# Altium PCB PCB1.PcbDoc
Units mil, origin at the board's own origin, x right, y up, seen from the top; angles counter-clockwise.
Board outline 2095 x 895 mil, 2 copper layers (Top Layer, Bottom Layer); 30 components, 51 nets, 163 pads, 44 vias.
Unrouted connection lines stored in the file: 40.
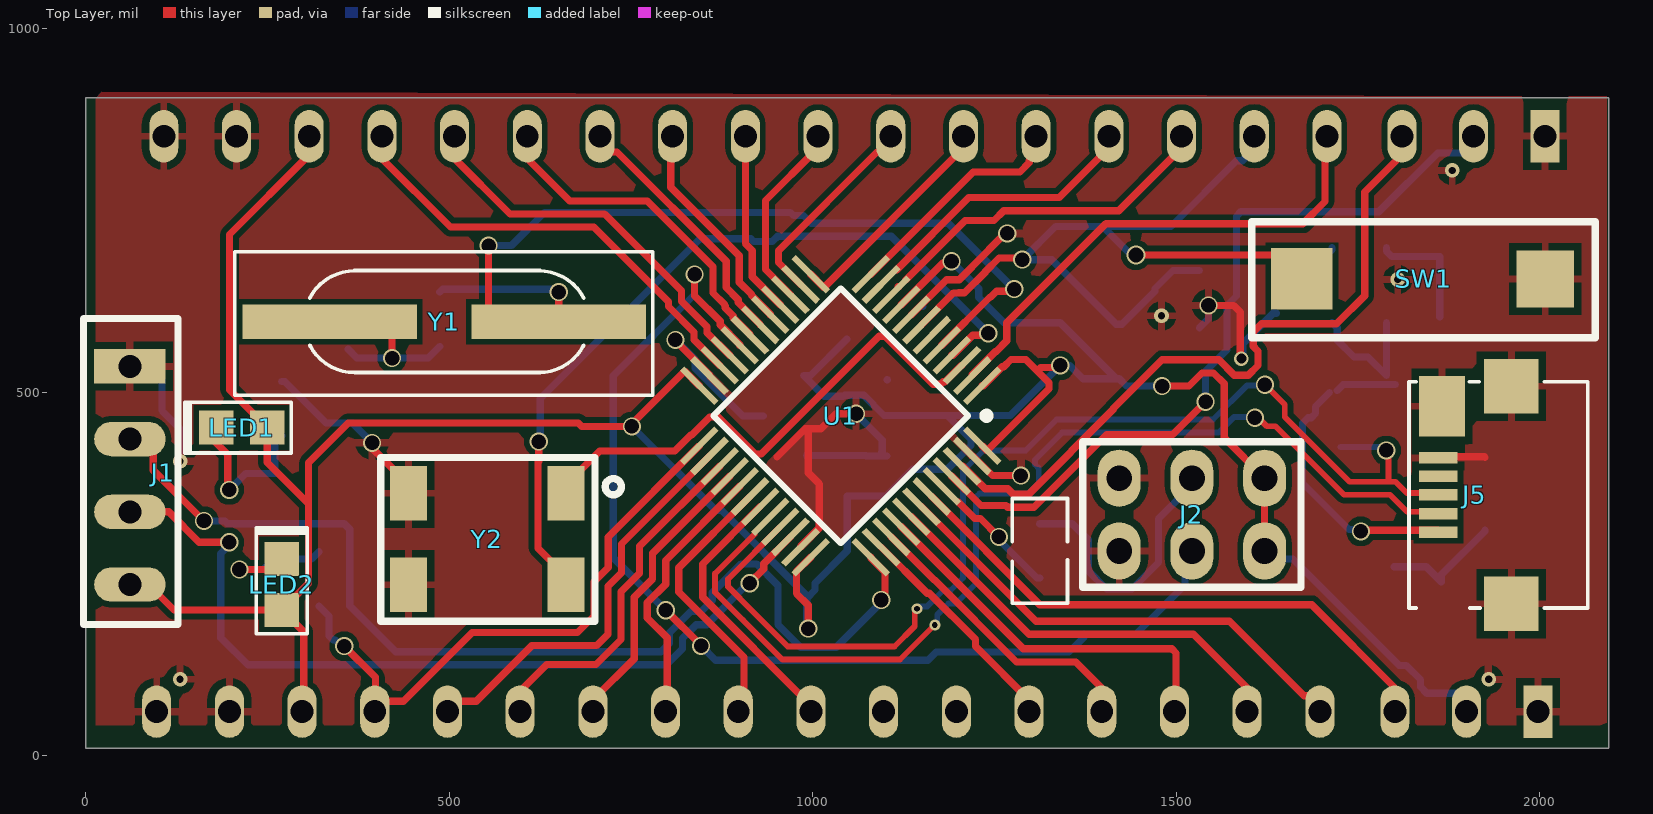
[diagram p0: Top Layer view]
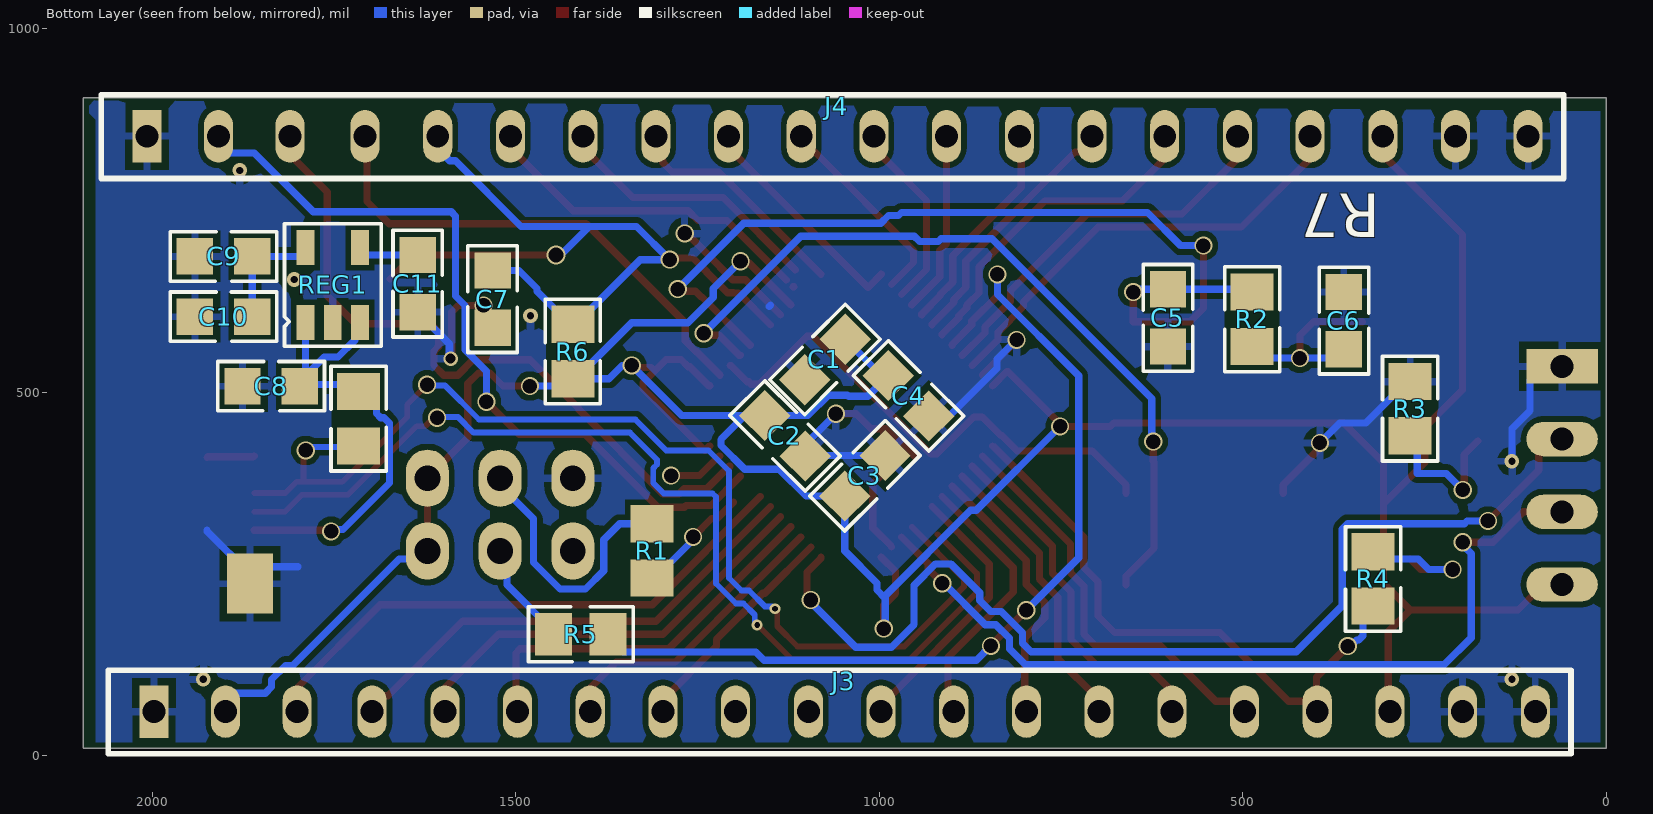
[diagram p1: Bottom Layer view, seen from below]
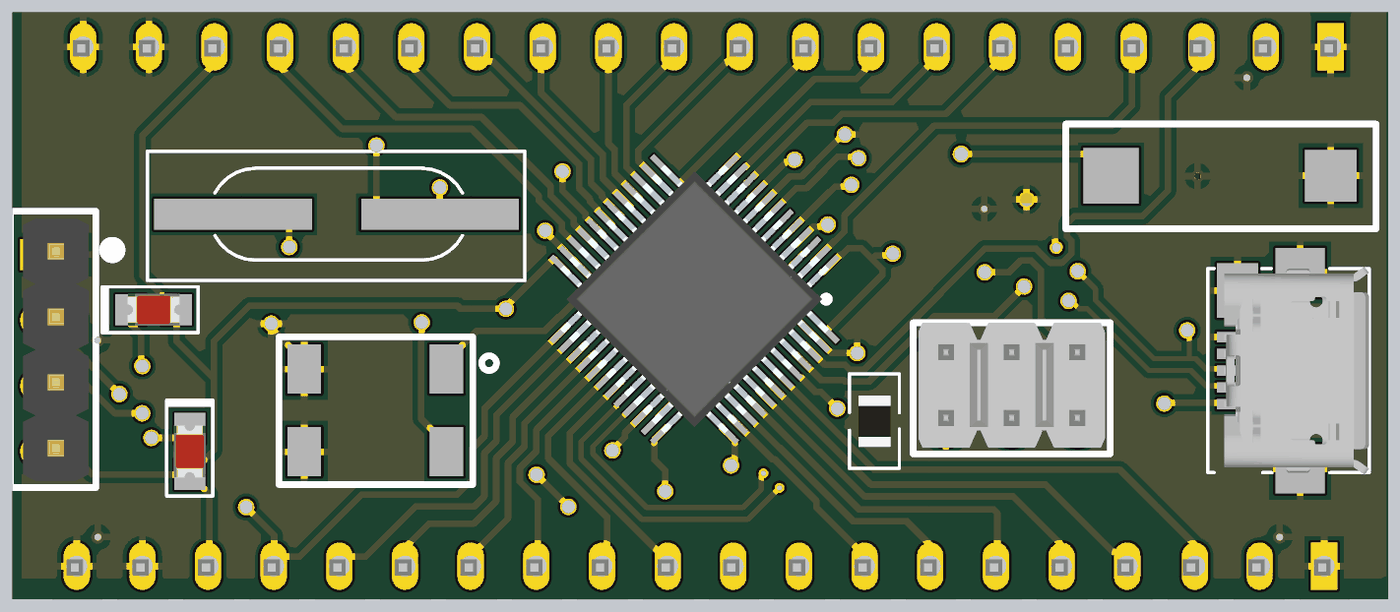
[diagram p2: 3D render of the assembled board from above, using the file's embedded part models]
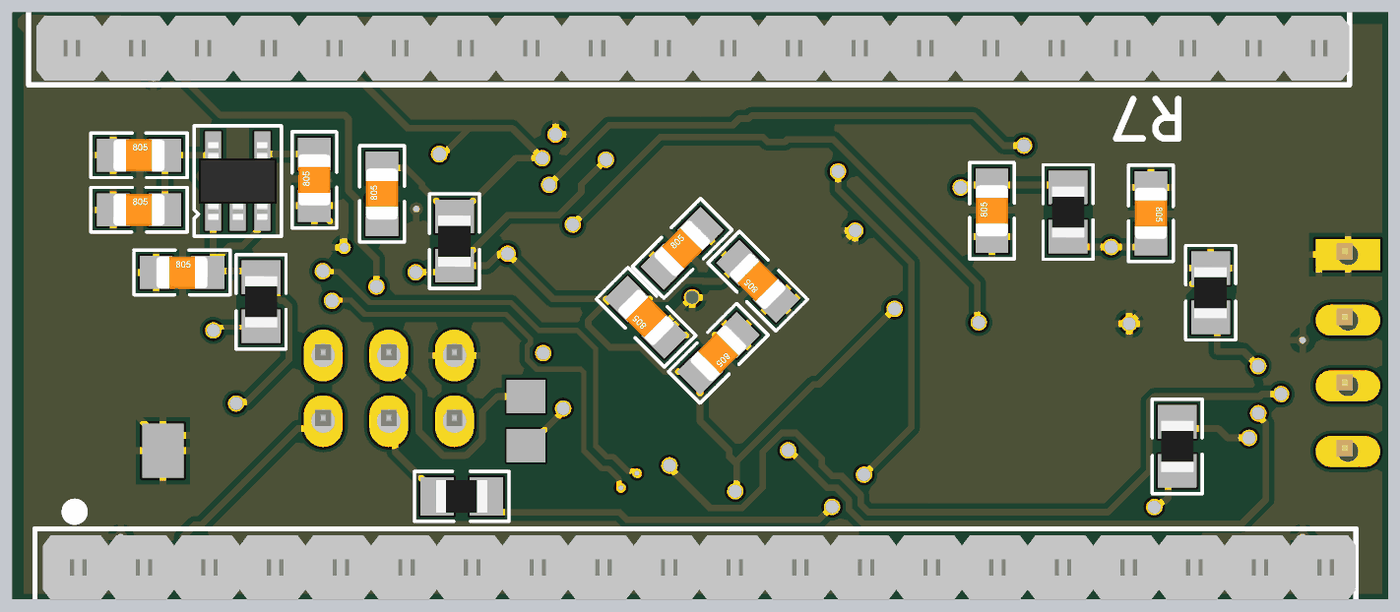
[diagram p3: 3D render of the assembled board from below, using the file's embedded part models]

## Layer stack, top to bottom
Top Solder: solder mask 0.4, Solder Resist, Dk 3.5
Top Layer: signal copper 1.4
Dielectric 1: dielectric 12.6, FR-4, Dk 4.8
Bottom Layer: signal copper 1.4
Bottom Solder: solder mask 0.4, Solder Resist, Dk 3.5

## Board outline
0,10 2095,10 2095,905 0,905

## Design rules (kind name [scope] priority, off if disabled: settings)
Clearance [All] p1: gap=8 ignorepadtopadclearanceinfootprint=TRUE
DiffPairsRouting DiffPair_90DiffPairsRouting [InDifferentialPairClass('diff_90')] p1: maxlimit=10 minlimit=10 mostfreqgap=10 toplayer_minwidth=8 toplayer_maxwidth=8 toplayer_prefwidth=8 bottomlayer_minwidth=8 bottomlayer_maxwidth=8 bottomlayer_prefwidth=8 maxuncoupledlength=500
DiffPairsRouting [All] p2: maxlimit=10 minlimit=10 mostfreqgap=10 toplayer_minwidth=15 toplayer_maxwidth=15 toplayer_prefwidth=15 bottomlayer_minwidth=15 bottomlayer_maxwidth=15 bottomlayer_prefwidth=15 maxuncoupledlength=500
MatchedLengths DiffPair_90MatchedLengths [InDifferentialPairClass('diff_90')] p1: tolerance=1000 checknetsindiffpair=FALSE checkdiffpairvsdiffpair=TRUE checkxsignals=TRUE checkothers=TRUE
MinimumSolderMaskSliver [All] p1: minsoldermaskwidth=1.57
PolygonConnect [All] p1: connectstyle=Relief reliefconductorwidth=10 reliefentries=4 polygonreliefangle="90 Angle" airgapwidth=10
RoutingVias [All] p1: holewidth=20 width=25 viastyle="Through Hole" minholewidth=11.81 minwidth=20 maxholewidth=20 maxwidth=28
SilkToSolderMaskClearance [IsPad] p1: minsilkscreentomaskgap=1.73 clearancetoexposedcopper=TRUE
SolderMaskExpansion [All] p1: expansion=4 istentingtop=FALSE
SupplyNets "Schematic Supply Nets_2" [InNet('+5')] p1: voltage=0.000
SupplyNets "Schematic Supply Nets_1" [InNet('NetLabel44')] p2: voltage=0.000
SupplyNets "Schematic Supply Nets" [InNet('GND')] p3: voltage=0.000
Width Width_1 [All] p1: maxlimit=10 minlimit=10 preferedwidth=10
Width [All] p2: maxlimit=10 minlimit=10 preferedwidth=10
27 further rules are at their usual default settings.

## Classes and differential pairs
differential pair class diff_90: D
component class Controller: C1 C2 C3 C4 C5 C6 C7 J1 J2 LED1 LED2 R1 R2 R3 R4 R5 R6 SW1 U1 Y1 Y2
component class Connector: C8 C9 C10 C11 J3 J5 l REG1
differential pair D: +D_P -D_N

## Components (designator, comment, footprint, x,y, rotation, side; value= is the part's Value field where it differs from the comment)
C1 "0.1uF" CAP_0805 1075,545 r135 bottom
C2 "0.1uF" CAP_0805 1130,440 r45 bottom
C3 "0.1uF" CAP_0805 1020,385 r315 bottom
C4 "0.1uF" CAP_0805 960,495 r45 bottom
C5 "22pF" CAP_0805 603.16,602.29 r90 bottom
C6 "22pF" CAP_0805 361.17,598.36 r270 bottom
C7 "0.1uF" CAP_0805 1532.14,627.95 r90 bottom
C8 "0.1uF" CAP_0805 1836.79,508.23 r180 bottom
C9 "0.1uF" CAP_0805 1902.28,686.76 r180 bottom
C10 "0.1uF" CAP_0805 1902.28,603.81 r180 bottom
C11 "22pF" CAP_0805 1635.22,649.37 r90 bottom
J1 "4X1 Bergstrip" CON4_100_40D72_TH_ST_MALE 61.02,535.46 r0 top
J2 "2X3 Berg Strip" CON6_100_59D78_TH_ST_Duplicate 1621.83,381.67 r180 top
J3 "20X1 Bergstrip" CON20_100_40D72_TH_ST 1997.82,60.61 r90 bottom
J4 "20X1 Bergstrip" CON20_100_40D72_TH_ST 2007.61,852 r90 bottom
J5 "MICRO USB2.0" CON_10118192-0001LF_SMD 1911.1,358.62 r90 top
LED1 "RED LED" LED_0805 214.97,451.4 r0 top
LED2 "RED LED" LED_0805 270,235.46 r270 top
R1 "10K" RES_0805#1 1312.71,281.67 r90 top
R2 "10Mohm" RES_0805#2 487.24,600.33 r90 bottom
R3 "1K" RES_0805#2 270,477.38 r270 bottom
R4 "1K" RES_0805#2 320.97,243.11 r90 bottom
R5 "10K" RES_0805#2 1410.82,167.01 r180 bottom
R6 "10K" RES_0805#2 1421.83,555.96 r270 bottom
R7 "10K" RES_0805#2 1716.47,463.56 r90 bottom
REG1 "RT9193-33GB" SOT23-5 1751.88,647.55 r180 bottom
SW1 "TACT SWITCH" SW_342_SMD 2007.86,655.74 r0 top
U1 "STM32F103C8T6" LQFP-48_19.6_393_58X11_SMD 1038.87,467.55 r225 top
Y1 "8MHz" XTAL_314_240X47_SMD 650.96,597 r180 top
Y2 "32.768KHz" "XTAL_MC-405 32.7680K-G3" 660.89,235.02 r180 top

## Footprints (in the part's own frame and the unit in brackets; to place one, negate y for a bottom-side part, rotate by r counter-clockwise, add the part's x,y. Pads: shape width x height; smd on the part's side, far side on the other; paste and mask are expansions set on the pad)
CAP_0805 [mil] "Ceramic Capacitor"
  rect 50x50 smd mask+3: 1(-39.37,0) 2(39.37,0)
  silkscreen extent -73,-34 73,34, body extent -39,-25 39,25, height 31
CON4_100_40D72_TH_ST_MALE [mm] "Berg Strip"
  rect 2.5x1.2 hole 0.8: 1(0,0)
  oval 2.5x1.2 hole 0.8: 2(0,-2.54) 3(0,-5.08) 4(0,-7.62)
  round 1.016 on Top Overlay: ""(2.311,0.178)
  silkscreen extent -1.63,-9.02 1.68,1.68, body extent -1.14,-8.76 1.4,1.4, height 8.55
CON6_100_59D78_TH_ST_Duplicate [mm] "Berg strip"
  oval 1.5x2 hole 0.9: 1(0,0) 2(0,2.54) 3(2.54,0) 4(2.54,2.54) 5(5.08,0) 6(5.08,2.54)
  silkscreen extent -1.27,-1.27 6.35,3.81, body extent -1.07,-1.27 6.15,3.56, height 8.18
CON20_100_40D72_TH_ST [mil] "Berg strip"
  rect 72x40 hole 31.5: 1(0,0)
  oval 72x40 hole 31.5: 2(0,-98.43) 3(0,-196.85) 4(0,-300) 5(0,-400) 6(0,-500) 7(0,-600) 8(0,-700) 9(0,-800) 10(0,-900) 11(0,-1000) 12(0,-1100) 13(0,-1200) 14(0,-1300) 15(0,-1400) 16(0,-1500) 17(0,-1600) 18(0,-1700) 19(0,-1800) 20(0,-1900)
  round 40 on Bottom Overlay: ""(83,2.57)
  silkscreen extent -58,-1949 57,63, body extent -51,-1949 47,51, height 323
CON_10118192-0001LF_SMD [mm] "USB2.0 MICRO"
  rect 0.4x1.35 smd: 1(-1.3,1.275) 2(-0.65,1.275) 3(0,1.275) 4(0.65,1.275) 5(1.3,1.275)
  rect 2.1x1.6 smd far side: 6(-3.1,1.15)
  rect 2.1x1.6 smd: 7(3.1,1.15)
  rect 1.9x1.9 smd: 8(-3.8,-1.275) 9(3.8,-1.275)
  silkscreen extent -3.95,-3.94 3.95,2.3, body extent -4.04,-3.94 4.04,1.66, height 2.81
LED_0805 [mm] "LED"
  rect 1.2x1.2 smd mask+0.076: A(0.889,0) K(-0.889,0)
  silkscreen extent -1.99,-0.89 1.73,0.89, body extent -1.01,-0.62 1.01,0.63, height 1.1
LQFP-48_19.6_393_58X11_SMD [mm] "48LQFP"
  rect 1.7x0.22 smd mask+0.076: 1(-4.238,2.75) 2(-4.238,2.25) 3(-4.238,1.75) 4(-4.238,1.25) 5(-4.238,0.75) 6(-4.238,0.25) 7(-4.238,-0.25) 8(-4.238,-0.75) 9(-4.238,-1.25) 10(-4.238,-1.75) 11(-4.238,-2.25) 12(-4.238,-2.75) 25(4.238,-2.75) 26(4.238,-2.25) 27(4.238,-1.75) 28(4.238,-1.25) 29(4.238,-0.75) 30(4.238,-0.25) 31(4.238,0.25) 32(4.238,0.75) 33(4.238,1.25) 34(4.238,1.75) 35(4.238,2.25) 36(4.238,2.75)
  rect 0.22x1.7 smd mask+0.076: 13(-2.75,-4.238) 14(-2.25,-4.238) 15(-1.75,-4.238) 16(-1.25,-4.238) 17(-0.75,-4.238) 18(-0.25,-4.238) 19(0.25,-4.238) 20(0.75,-4.238) 21(1.25,-4.238) 22(1.75,-4.238) 23(2.25,-4.238) 24(2.75,-4.238) 37(2.75,4.238) 38(2.25,4.238) 39(1.75,4.238) 40(1.25,4.238) 41(0.75,4.238) 42(0.25,4.238) 43(-0.25,4.238) 44(-0.75,4.238) 45(-1.25,4.238) 46(-1.75,4.238) 47(-2.25,4.238) 48(-2.75,4.238)
  silkscreen extent -3.72,-3.15 3.15,3.72, body extent -4.5,-4.5 4.5,4.5, height 1.7
RES_0805#1 [mm] "Resister"
  rect 1.3x1.5 smd far side mask+0.076: 1(0.95,0) 2(-0.95,0)
  silkscreen extent -1.83,-0.97 1.83,0.97, body extent -1,-0.63 1,0.62, height 0.5
RES_0805#2 [mm] "Resister"
  rect 1.3x1.5 smd mask+0.076: 1(0.95,0) 2(-0.95,0)
  silkscreen extent -1.83,-0.97 1.83,0.97, body extent -1,-0.63 1,0.62, height 0.5
SOT23-5 [mm] "CASE: SOT"
  rect 0.62x1.22 smd mask+0.076: 1(-0.953,-1.31) 2(-0.003,-1.31) 3(0.947,-1.31) 4(0.952,1.31) 5(-0.953,1.31)
  silkscreen extent -1.69,-2.14 1.69,2.14, body extent -1.5,-1.5 1.5,1.5, height 1.41
SW_342_SMD [mm] "CASE: SMD"
  rect 2x2 smd: 1(0,0)
  rect 2.15x2.15 smd: 2(-8.5,0)
  silkscreen extent -10.25,-2.06 1.75,2, body extent -7.17,-1.79 -1.17,1.71, height 2.4
XTAL_314_240X47_SMD [mm] "CASE: TH"
  rect 6.096x1.2 smd: 1(0,0) 2(8,0)
  silkscreen extent -3.29,-2.44 11.32,2.57, body extent -2.99,-2.27 10.9,2.41, height 3.05
"XTAL_MC-405 32.7680K-G3" [mm] "Crystal"
  rect 1.3x1.9 smd: 1(0,-3.2) 2(5.5,-3.2) 3(5.5,0) 4(0,0)
  silkscreen extent -1.93,-4.44 6.48,1.27, body extent -1.02,-4.44 6.48,1.27, height 3.6

## Part data
C1 C2 C3 C4 C7 C8 C9 C10: library part CAP_0.1uF-50V-5%-0805, "0.1µF ±5% 50V Ceramic Capacitor X7R 0805 (2012 Metric)", Case/Package="0805 (2012 Metric)", Manufacturer=KEMET, Manufacturing Part Number=C0805C104J5RACTU, Supplier Part Number-1=399-1171-1-ND, Supplier-1=Digikey
C5 C6 C11: library part CAP_22pF-50V-5%-0805, "22pF ±5% 50V Ceramic Capacitor C0G, NP0 0805 (2012 Metric)", Case/Package=0805, Manufacturer=KEMET, Manufacturer Part Number=C0805C220J5GACTU, Supplier Part Number-1=399-1113-1-ND, Supplier-1=Digikey
J1: library part CON-BS-PLG_4X1-100-TH-ST, "4 pin, 1 row, 2.54mm pitch bergstrip", Case/Package=TH, Manufacturer=NA, Manufacturing Part Number=NA, Supplier Part Number-1=NA, Supplier-1=NA
J2: library part CON-BS-PLG_2X3-100-TH-ST, "6 pin, 2 row, 2.54mm pitch bergstrip", Case/Package=TH, Manufacturer=NA, Manufacturer Part Number=NA, Supplier Part Number-1=NA, Supplier-1=NA
J3 J4: library part CON-BS-PLG_20X1-100-TH-ST, "20 pin, 1 row, 2.54mm pitch bergstrip", Case/Package=TH, Manufacturer=NA, Manufacturing Part Number=NA, Supplier Part Number-1=NA, Supplier-1=NA
J5: library part CON-USB_10118192-0002LF-SMD, "USB - micro B USB 2.0 Receptacle Connector 5 Position Surface Mount, Right Angle", Case/Package=SMD, Manufacturer="Amphenol ICC (FCI)", Manufacturing Part Number=10118192-0002LF, Supplier Part Number-1=609-5379-1-ND, Supplier-1=Digikey
LED1 LED2: library part LED-RED_10mA-0805, "Red 621nm LED Indication - Discrete 2V 0805 (2012 Metric)", Case/ Package=0805, Manufacturer="Lite-On Inc.", Manufacturer Part Number=LTST-C170EKT, Supplier Part Number-1=160-1178-1-ND, Supplier-1=Digikey
R1 R5 R6 R7: library part RES_10K-0.125W-1%-0805, "10 kOhms ±1% 0.125W, 1/8W Chip Resistor 0805 (2012 Metric) Moisture Resistant Thick Film", Case/Package=0805, Manufacturer=Yageo, Manufacturing Part Number=RC0805FR-0710KL, Supplier Part Number-1=311-10.0KCRCT-ND, Supplier-1=Digikey
R2: library part RES_10MOHM-0.125W-1%-0805, "10 MOhms ±1% 0.125W, 1/8W Chip Resistor 0805 (2012 Metric) Automotive AEC-Q200, High Voltage Thick Film", Case/Package="0805 (2012 Metric)", Manufacturer="Rohm Semiconductor", Manufacturing Part Number=KTR10EZPF1005, Supplier Part Number-1=RHM10.0MAHCT-ND, Supplier-1=Digikey
R3 R4: library part RES_1K-0.125W-1%-0805, "1 kOhms ±1% 0.125W, 1/8W Chip Resistor 0805 (2012 Metric) Moisture Resistant Thick Film", Case/Package=0805, Manufacturer=垈㎵á, Manufacturer Part Number=RC0805FR-071KL, Supplier Part Number-1=311-1.00KCRCT-ND, Supplier-1=Digikey
REG1: library part REG_3.3V-5.5V-0.3A-SOT-23-5, "Linear Voltage Regulator IC 1 Output 300mA SOT-23-5", Case/ Package=SOT-23-5, Manufacturer="Richtek USA Inc.", Supplier Part Number-1=1028-1014-1-ND, Manufacturer Part Number=RT9193-33GB, Supplier-1=Digikey
SW1: library part SW_KSR223GLFG-SMD, "Tactile Switch SPST-NO Top Actuated Surface Mount", Case/Package=SMD, Manufacturer=C&K, Manufacturing Part Number=KSR223GLFG, Supplier Part Number-1=401-1704-1-ND, Supplier-1=Digikey
U1: library part "IC-STM32F103C8T6 _1", "ARM® Cortex®-M3 STM32F1 Microcontroller IC 32-Bit 72MHz 64KB (64K x 8) FLASH", Case/Package=48-LQFP, Manufacturer=STMicroelectronics, Supplier Part Number-1=497-6063-ND, Manufacturer Part Number=STM32F103C8T6, Supplier-1=Digikey
Y1: library part XTAL_8MHZ-LFXTAL030234, "Crystals 8MHz 22pF -20C 70C", Case/Package=SMD, Manufacturer="IQD Frequency Products", Manufacturing Part Number=LFXTAL030234Reel, Supplier Part Number-1=449-LFXTAL030234REEL, Supplier-1=Mouser
Y2: library part "XTAL_32.768KHz-MC-405 32.7680K-G3", "Crystals SMD AT XTL MHZ +/-50PPM 12.5 PF 250 T/R", Case/Package=SMD, Manufacturer=Epson, Manufacturing Part Number="MC-405 32.7680K-G3: ROHS", Supplier Part Number-1=732-MC405327680KG3RS, Supplier-1=Mouser

## Via types
v1: diameter 25, hole 20, Top Layer to Bottom Layer, 34 vias
v2: diameter 20, hole 10, Top Layer to Bottom Layer, tented both sides, 6 vias
v3: diameter 15, hole 8, Top Layer to Bottom Layer, 2 vias
v4: diameter 20, hole 13.78, Top Layer to Bottom Layer, 1 vias
v5: diameter 25.75, hole 20.81, Top Layer to Bottom Layer, 1 vias

## Nets (pads, with @x,y where several pads share a name; then routed paths per layer and width w, separated by ;. In a path a pad name is that pad's centre, name@x,y a point inside that pad or via, vN(x,y) a via of type N, cw(c..) or ccw(c..) an arc to the next point about the centre after c; other vN are vias at no path point)
+5: C8.2 J5.1 R7.1 REG1.1 REG1.3 | length 622.6
  Top Layer w10: v1@1759.65,309.92 J5.1@1860.08,309.92
  Bottom Layer w10: R7.1@1711.16,499.59 1691.95,480.38 1691.95,470.61 1686.09,464.76 1681.56,464.76 1673.95,457.14 1673.95,374.97 1737.91,311 1751.87,311 v1(1754.34,308.53) ; REG1.3 1721.79,588.77 1721.79,571.57 1744.83,548.52 1763.87,548.52 1789.39,523 REG1.1 ; R7.1@1721.79,502.35 1729.91,510.47 C8.2@1801.92,510.47
BOOT0: J2.3 R1.1 | length 375.5
  Bottom Layer w10: R1.1 1357.24,319.07 1379.3,297.01 1379.3,254.21 1404.22,229.3 1439.45,229.3 1475.95,265.8 1475.95,325.94 1521.83,371.83 J2.3
BOOT1: J2.4 R5.2 | length 145.1
  Bottom Layer w10: R5.2 1448.22,170.95 1512.45,235.18 1512.45,272.28 J2.4
D_N: J5.2 U1.32 | length 1429.2
  Top Layer w8: U1.32@920.09,304.64 865.87,250.42 865.87,224.8 904.24,186.44 958.46,132.21 1120.25,132.21 1167.9,179.86 v3(1168.21,179.86) ; v1(1608.46,464.95) 1613.06,464.95 1624.96,453.04 1636.86,453.04 1731.02,358.89 1794.46,358.89 1817.85,335.51 J5.2@1860.08,335.51
  Bottom Layer w8: v3(1168.21,179.86) 1171.46,183.11 1171.46,193.72 1186.95,209.21 1197.25,209.21 1224.93,236.89 1224.93,356.11 1229.61,360.79 1251.09,360.79 1296.8,360.79 1311.16,375.14 1311.16,395.44 1306.05,400.54 1306.05,407.17 1343.22,444.34 1558.25,444.34 1579.96,466.04 1607.36,466.04 v1(1608.46,464.95)
D_P: J5.3 R7.2 U1.33 | length 1549.1
  Top Layer w8: U1.33 883.87,242.96 883.87,232.26 916.96,199.17 965.92,150.21 1112.8,150.21 1140.54,177.95 1140.54,198.86 v3(1143.79,202.11) ; v1(1622.34,510.2) 1649.59,482.95 1649.59,465.77 1738.47,376.89 1792.42,376.89 ; v1@1792.42,419.23 1792.42,376.89 ; J5.3@1860.08,361.1 1859.88,361.3 1817.51,361.3 1801.92,376.89 1792.42,376.89
  Bottom Layer w8: v3(1143.79,202.11) 1147.04,205.36 1157.65,205.36 1179.5,227.21 1189.8,227.21 1206.93,244.34 1206.93,391.66 1235.16,419.9 1293.32,419.9 1335.76,462.34 1550.8,462.34 1597.84,509.38 1621.53,509.38 v1(1622.34,510.2) ; R7.2@1726.32,424.78 1779.65,424.78 1784.54,419.89 v1(1789.15,419.89)
GND: C1.1 C2.1 C3.1 C4.1 C5.1 C6.1 C7.1 C8.1 C9.1 C10.1 C11.1 J1.1 J2.5 J2.6 J3.1 J3.19 J3.20 J4.1 J4.19 J4.20 J5.5 J5.6 J5.7 J5.8 J5.9 R3.2 REG1.2 SW1.1 U1.8 U1.23 U1.35 U1.47 Y2.2 Y2.3 | length 1920.4
  Top Layer w10: v1(394.17,430.18) 397.04,427.31 397.04,420.14 444.36,372.82 Y2.2 ; v1(811.4,572) 811.4,570.69 858.25,523.84 U1.23 ; 951.16,411.2 989.54,449.58 994.1,449.58 ; U1.35 983.52,287.88 1009.33,313.69 1009.33,373.85 994.1,389.08 994.1,449.58 ; v1(1059.87,470.33) 1032.29,470.33 1011.54,449.58 994.1,449.58 ; U1.8 1184.19,654.64 1201.7,654.64 1219.49,672.42 1219.49,672.97 1264.96,718.45 v1(1267.86,718.45) ; U1.47 1220.59,412.21 1247.51,385.29 v1(1286.66,385.29) ; J2.5 J2.5@1441.06,400.9 ; v1(1544.65,619.34) 1579.2,619.34 1588.21,610.33 1588.21,547.81 v4(1589.79,546.23) ; J5.5@1860.08,412.28 1861.22,411.14 1923.86,411.14 1925,410
  Bottom Layer w10: J1.1 86.61,535.46 105.23,516.84 105.23,474.65 130,449.89 v2(130,405) ; R3.2 273.93,514.78 331.15,457.55 366.8,457.55 v1(394.17,430.18) ; v1(811.4,572) 838.25,545.15 838.25,532.79 903.88,467.16 C4.1 ; C3.1 1073.21,412.83 1073.88,412.16 C2.1@1090.76,412.16 ; v1(1059.87,470.33) 1095.96,434.24 1095.96,417.36 C2.1@1090.76,412.16 ; C2.1 C2.1@1090.76,412.16 ; 1149.89,619.51 1151.66,617.74 ; v1@1283.79,388.16 v1(1286.66,385.29) ; C7.1 1544.65,601.09 v1(1544.65,619.34) ; v4(1589.79,546.23) 1591.7,548.15 1591.7,566.48 1633.71,608.49 C11.1@1638.13,608.49 ; 1800,260 1844.05,260 1865,239.05 1865,248.89 1925,308.89 1925,310
  other v2: 130,105 1930,105 1480,605 1805,655 1880,805
NetC6_2: C6.2 R2.2 Y1.2 | length 262.4
  Top Layer w10: Y1.2 403.01,597 421.63,578.38 v1(421.63,547)
  Bottom Layer w10: C6.2 373.16,547 v1(421.63,547) 471.31,547 R2.2
NetC9_2: C9.2 C10.2 REG1.5 | length 164.6
  Bottom Layer w10: REG1.5 1789.39,693.97 1796.59,686.77 C9.2 C10.2
NetC11_2: C11.2 REG1.4 | length 80.3
  Bottom Layer w10: C11.2@1640.22,688.74 1707.18,688.74 1714.39,695.94 REG1.4
NetLabel44: C1.2 C2.2 C3.2 C4.2 J1.4 J2.1 J2.2 J3.2 J3.18 J4.18 LED1.A LED2.A R6.1 U1.1 U1.9 U1.24 U1.36 U1.48 | length 4726.7
  Top Layer w10: J1.4 86.61,235.46 121.61,200.46 LED2.A ; LED1.A@249.77,451.4 249.77,403.24 306.62,346.4 ; LED1.A 198,503.37 198,717 305,824 J4.18@305,840 ; J3.18@300,75 300,170.45 LED2.A ; U1.24 824.84,528.47 823.56,528.47 751.5,456.41 v1(751.5,452.83) 682.47,452.83 677.75,457.55 361.17,457.55 306.62,403 306.62,346.4 ; v1(994.1,174.71) 994.1,206.78 977.96,222.93 977.96,253.53 U1.36 ; U1.9 1178.99,677.27 1188.27,677.27 v1(1191.14,680.14) ; U1.48 1239.26,420.27 1240.54,420.27 1325.11,504.84 1325.11,513.12 1309.12,529.11 ; U1.1 1234.69,508.98 1260.78,535.08 1262.89,535.08 1272.9,545.09 1293.14,545.09 1309.12,529.11 ; v1(1340.81,536.82) 1337.94,533.95 1313.96,533.95 1309.12,529.11 ; v1(1480.85,508.45) 1517.73,508.45 1535.75,526.47 1551.57,526.47 1566.15,511.89 1566.15,437.35 J2.1 J2.2 ; LED2.A 306.62,237.08 306.62,346.4
  Bottom Layer w10: v1(751.5,452.83) 866.76,337.57 874.72,337.57 992.16,220.14 992.16,216.68 ; v1(994.1,174.71) 992.16,176.65 992.16,216.68 ; C1.2 997.16,522.84 C4.2 1016.13,494.55 1042.64,494.55 1043.92,495.83 1070.44,495.83 1098.43,467.84 C2.2@1185.23,467.84 ; v1(1191.14,680.14) 1228.62,642.66 1228.62,630.25 1263.23,595.63 1340.81,595.63 R6.1@1417.89,518.55 ; v1(1480.85,508.45) 1431.93,508.45 R6.1 R6.1@1417.89,518.55 ; J2.2 1632.95,270.55 1660.5,270.55 1807.05,124 1816.82,124 1836.15,104.67 1836.15,94.9 1845.05,86 1890.57,86 J3.2@1901.57,75 ; 992.16,216.68 1003.47,227.99 1003.47,237.36 1047.84,281.72 C3.2 1100.9,357.16 1137.91,394.16 1185.39,394.16 1218,426.78 1218,435.07 C2.2@1185.23,467.84 ; C2.2@1185.23,467.84 1271.83,467.84 v1(1340.81,536.82) 1353.84,536.82 1372.11,518.55 R6.1@1417.89,518.55
NetLED1_K: LED1.K R3.1 | length 203.7
  Top Layer w10: LED1.K@177.09,432.92 195.71,414.3 195.71,367.53 v1(197.69,365.55)
  Bottom Layer w10: v1(197.69,365.55) 220.16,388.02 260.2,388.02 260.2,430.18 R3.1
NetLED2_K: LED2.K R4.1 | length 183.8
  Top Layer w10: v1(211.59,256.11) 255.65,256.11 LED2.K
  Bottom Layer w10: v1(211.59,256.11) 244.35,256.11 258.7,270.46 310.92,270.46 R4.1
NetR1_2: R1.2 U1.44 | length 157.7
  Top Layer w10: U1.44@1200.66,348.63 1223.11,326.18 1230.99,326.18 v1(1256.31,300.86)
  Bottom Layer w10: v1(1256.31,300.86) 1259.18,297.99 1259.18,293.86 1308.77,244.27 R1.2
NetR5_1: R5.1 U1.20 | length 1282.6
  Top Layer w10: v1(798.15,200.08) 846.71,151.52 v1(846.71,151.06) ; v1(837.7,662.09) 837.7,632.67 872.9,597.48 872.9,592.71 900.01,565.6 U1.20
  Bottom Layer w10: v1(798.15,200.08) 726,272.23 726,522.67 837.7,634.37 v1(837.7,662.09) ; v1(846.71,151.06) 866.56,131.21 1158.82,131.21 1170.09,142.49 1352.83,142.49 1373.42,163.08 R5.1
NRST: C7.2 J4.5 R6.2 SW1.2 U1.7 | length 1184.5
  Top Layer w10: U1.7 1193.99,636.59 1201.11,636.59 1201.15,636.64 1209.16,636.64 1237.49,664.97 1237.49,665.52 1256.43,684.46 1286.22,684.46 v1(1288.36,682.31) ; v5(1444.86,688.69) 1640.27,688.69 SW1.2
  Bottom Layer w10: v5@1444.8,682.31 1399.12,728 ; C7.2 1495.8,667.33 1471.08,642.6 1471.08,638.67 1425.77,593.35 R6.2 1417.89,593.35 1328.93,682.31 v1(1288.36,682.31) 1334.05,728 1399.12,728 ; J4.5@1605,840 1605,832.12 1591.14,818.26 1583.26,818.26 1493,728 1399.12,728
PA0: J4.6 U1.10 | length 458.6
  Top Layer w10: U1.10@1117.95,645.18 U1.10@1119.05,645.18 ; U1.10@1128.26,654.38 1210.13,736.25 1249.61,736.25 1263.06,749.7 1421.31,749.7 1505,833.39 J4.6@1505,840
PA1: J4.7 U1.11 | length 364.3
  Top Layer w10: U1.11@1115.64,668.5 1214.84,767.7 1339.31,767.7 1405,833.39 J4.7@1405,840
PA2: J4.8 U1.12 | length 321.6
  Top Layer w10: U1.12 1221.2,803 1285.34,803 1298.23,815.88 1298.23,818.5 1307.61,827.88 J4.8
PA3: J4.9 U1.13 | length 299.7
  Top Layer w10: U1.13 1015.1,644.44 1016.05,644.44 1205,833.39 J4.9@1205,840
PA4: J4.10 U1.14 | length 271.1
  Top Layer w10: U1.14 953.2,678.5 953.2,694.67 1088.79,830.26 1095.26,830.26 J4.10@1105,840
PA5: J4.11 U1.15 | length 248.9
  Top Layer w10: U1.15 935.2,668.66 935.2,763.59 1005,833.39 J4.11@1005,840
PA6: J4.12 U1.16 | length 240.7
  Top Layer w10: J4.12@905,840 907.61,837.39 907.61,704.62 917.2,695.02 917.2,658.82 U1.16
PA7: J4.13 U1.17 | length 290.2
  Top Layer w10: J4.13@805,840 805,781.77 899.2,687.57 899.2,651.36 915.91,634.65 915.91,633.21 941.77,607.36 U1.17
PA8: J3.13 U1.29 | length 359.5
  Top Layer w10: J3.13@800,75 800,162.17 772.65,189.52 772.65,210.64 797.98,235.98 797.98,268.43 U1.29
PA9: J3.12 U1.30 | length 361.7
  Top Layer w10: J3.12@900,75 905.74,80.74 905.74,135.44 815.98,225.19 815.98,258.59 U1.30
PA10: J3.11 U1.31 | length 367.8
  Top Layer w10: U1.31 848.87,263.64 848.87,217.76 991.63,75 J3.11@1000,75
PA11: J3.10
PA12: J3.9
PA15: J3.8 U1.38 | length 299.3
  Top Layer w10: U1.38 1157.6,223.55 1160.59,223.55 1224.3,159.83 1224.3,150.12 1299.43,75 J3.8@1300,75
PB0: J4.14 U1.18 | length 349.4
  Top Layer w10: J4.14@705,840 714.74,830.26 731.06,830.26 881.2,680.11 881.2,643.91 897.91,627.19 897.91,623.37 927.85,593.44 U1.18
PB1: J4.15 U1.19 | length 452
  Top Layer w10: J4.15@605,840 605,824 665.87,763.13 772.73,763.13 863.2,672.65 863.2,636.45 878.85,620.81 878.85,619.53 879.91,618.46 879.91,615.92 890.9,604.93 890.9,602.55 913.93,579.52 U1.19
PB3: J3.7 U1.39 | length 394.8
  Top Layer w10: U1.39 1167.44,241.55 1168.04,241.55 1280.62,128.97 1362.03,128.97 1400,91 J3.7@1400,75
PB4: J3.6 U1.40 | length 516
  Top Layer w10: U1.40 1289.85,146.97 1494.14,146.97 1500,141.11 J3.6@1500,75
PB5: J3.5 U1.41 | length 578.5
  Top Layer w10: U1.41 1297.65,167.01 1523.99,167.01 1600,91 J3.5@1600,75
PB6: J3.4 U1.42 | length 669.4
  Top Layer w10: U1.42 1307.49,185.01 1573.42,185.01 1676.08,82.35 1683.96,82.35 1697.82,68.49 J3.4
PB7: J3.3 U1.43 | length 765.3
  Top Layer w10: U1.43 1312.71,207.63 1686.52,207.63 1803.15,91 J3.3@1803.15,75
PB8: J4.2 U1.45 | length 1063.5
  Top Layer w10: U1.45 1231.84,344.18 1266.25,344.18 1268.64,341.79 1304.67,341.79 1404.55,441.67 1495.48,441.67 v1(1540.65,486.84)
  Bottom Layer w10: v1(1540.65,486.84) 1540.65,528.7 1570.15,558.2 1570.15,619.34 1583.26,632.46 1583.26,742.19 1589.12,748.04 1778.86,748.04 1859.82,829 1895.57,829 J4.2@1906.57,840
PB9: J4.3 U1.46 | length 964.9
  Top Layer w10: U1.46 1206.67,398.29 1237.67,367.29 1268.59,367.29 1276.09,359.79 1297.22,359.79 1413.8,476.37 1413.8,477.46 1480.81,544.47 1559.03,544.47 1580.26,523.23 1599.32,523.23 1612.79,536.71 1612.79,556.41 1606.21,562.99 1606.21,582.7 1617.55,594.04 1720.87,594.04 1759.61,632.78 1759.61,775.46 1808.15,824 J4.3@1808.15,840
PB10: J4.16 U1.21 | length 523.3
  Top Layer w10: J4.16@505,840 505,824 583.87,745.13 713.96,745.13 819.7,639.39 819.7,625.22 854.9,590.02 854.9,581.93 U1.21
PB11: J4.17 U1.22 | length 612.2
  Top Layer w10: J4.17@405,840 405,824 501.87,727.13 699.07,727.13 801.7,624.5 801.7,617.76 836.9,582.56 836.9,572.09 U1.22
PB12: J3.17 R4.2 U1.25 | length 808.3
  Top Layer w10: v1(355.89,150.65) 398.7,107.84 398.7,78.16 401.87,75 437.33,75 531.73,169.4 676.64,169.4 699.48,192.24 699.48,239.3 719.07,258.89 719.07,300.87 U1.25
  Bottom Layer w10: R4.2 334.81,191.87 334.81,164.95 340.67,159.09 343.39,159.09 351.83,150.65 v1(355.89,150.65)
PB13: J3.16 U1.26 | length 559.7
  Top Layer w10: J3.16@500,75 537.33,75 613.73,151.4 702.9,151.4 718.65,167.15 718.65,233.01 737.07,251.43 737.07,291.03 U1.26
PB14: J3.15 U1.27 | length 475.8
  Top Layer w10: J3.15@600,75 600,91 634.3,125.3 702.26,125.3 736.65,159.69 736.65,225.55 761.98,250.89 761.98,288.11 U1.27
PB15: J3.14 U1.28 | length 386.5
  Top Layer w10: J3.14@700,75 700,78.79 754.65,133.44 754.65,218.1 779.98,243.43 779.98,278.27 U1.28
PC13: J4.4 U1.2 | length 677.5
  Top Layer w10: U1.2 1219.49,524 1251.13,555.64 1252.23,555.64 1267.17,570.58 1267.17,595.37 1403.5,731.7 1674.4,731.7 1705,762.31 J4.4@1705,840
SWCLK: J1.2 U1.37 | length 1473.1
  Top Layer w10: J1.2 75.77,435.46 92.97,418.25 92.97,392.78 v1(162.89,322.86) ; U1.37 1080.29,271.74 1099.78,252.25 1099.78,223.56 1094.41,218.19 v1(1094.41,214.13)
  Bottom Layer w10: v1(162.89,322.86) 191.64,322.86 195.39,319.1 355.89,319.1 363.51,311.49 363.51,249.54 363.5,206.12 426.71,142.91 791.61,142.91 803.21,154.51 803.21,169.08 832.37,198.23 846.94,198.23 862.09,213.39 862.09,223.99 901.91,263.81 923.03,263.81 952.32,234.53 952.32,180.44 983.54,149.21 1032.65,149.21 1094.41,210.97 v1(1094.41,214.13)
SWDIO: J1.3 U1.34 | length 1138.6
  Top Layer w10: J1.3@97.56,335.46 114.23,335.46 156.08,293.6 v1(197.59,293.6) ; v1(913.71,237.07) 913.71,237.89 932.75,256.92 932.75,264 U1.34
  Bottom Layer w10: v1(197.59,293.6) 197.59,289.54 186.09,278.04 186.09,162.15 223.33,124.91 799.07,124.91 821.21,147.05 821.21,161.62 839.82,180.23 854.39,180.23 911.23,237.07 v1(913.71,237.07)
XTALA: C5.2 R2.1 U1.5 Y1.1 | length 1315.5
  Top Layer w10: v1(554.31,701.63) 554.31,615.62 572.93,597 Y1.1 v1(650.96,637.73) ; U1.5 1243.97,630.89 1245,630.89 1252.99,638.89 1274.63,638.89 v1(1277.5,641.76)
  Bottom Layer w10: R2.1 491.18,641.67 C5.2 647.02,641.67 v1(650.96,637.73) ; v1(554.31,701.63) 585.72,701.63 631.3,747.2 969.6,747.2 973.91,742.9 987.66,742.9 998.03,732.53 1186.73,732.53 v1(1277.5,641.76)
XTALB: U1.6
XTALC: U1.3 Y2.1 | length 721.2
  Top Layer w10: Y2.1 660.89,372.82 707.15,419.08 810.54,419.08 832.58,441.12 833.86,441.12 858.6,465.86 870.32,465.86 921.19,414.98 929.48,414.98 1091.45,576.94 1099.73,576.94 1165.66,511.01 1176.43,511.01 1179.84,514.42 1182.23,514.42 1204.62,536.82 U1.3
XTALD: U1.4 Y2.4 | length 1103.3
  Top Layer w10: v1(623.33,432.05) 623.33,404.82 622.3,403.79 622.3,285.43 660.89,246.84 Y2.4 ; U1.4 1192.75,550.74 1220.28,578.27 1238.8,578.27 v1(1241.67,581.14)
  Bottom Layer w10: v1(623.33,432.05) 625.33,434.05 625.33,491.24 845.08,710.99 914.91,710.99 918.72,707.18 944.6,707.18 951.95,714.53 1108.28,714.53 v1(1241.67,581.14)
pads on no net: J1. J3. J4. J5.4

## Polygon pours and split planes (outlines as drawn)
GND on Top Layer "GND_L01_P001" (solid, remove dead copper, pour order 1): 17.03,913.23 13.83,910.03 13.83,41.81 2083.54,41.81 2092.45,32.9 2092.45,906.83
GND on Bottom Layer "GND_L02_P003" (solid, remove dead copper, pour order 3): 8.33,886.59 8.33,18.37 2078.03,18.37 2078.03,874.48 2086.94,883.39 2086.94,901.45